# EAGLE board attiny85_5x4_led_matrix_badge (EAGLE 9.5.2)
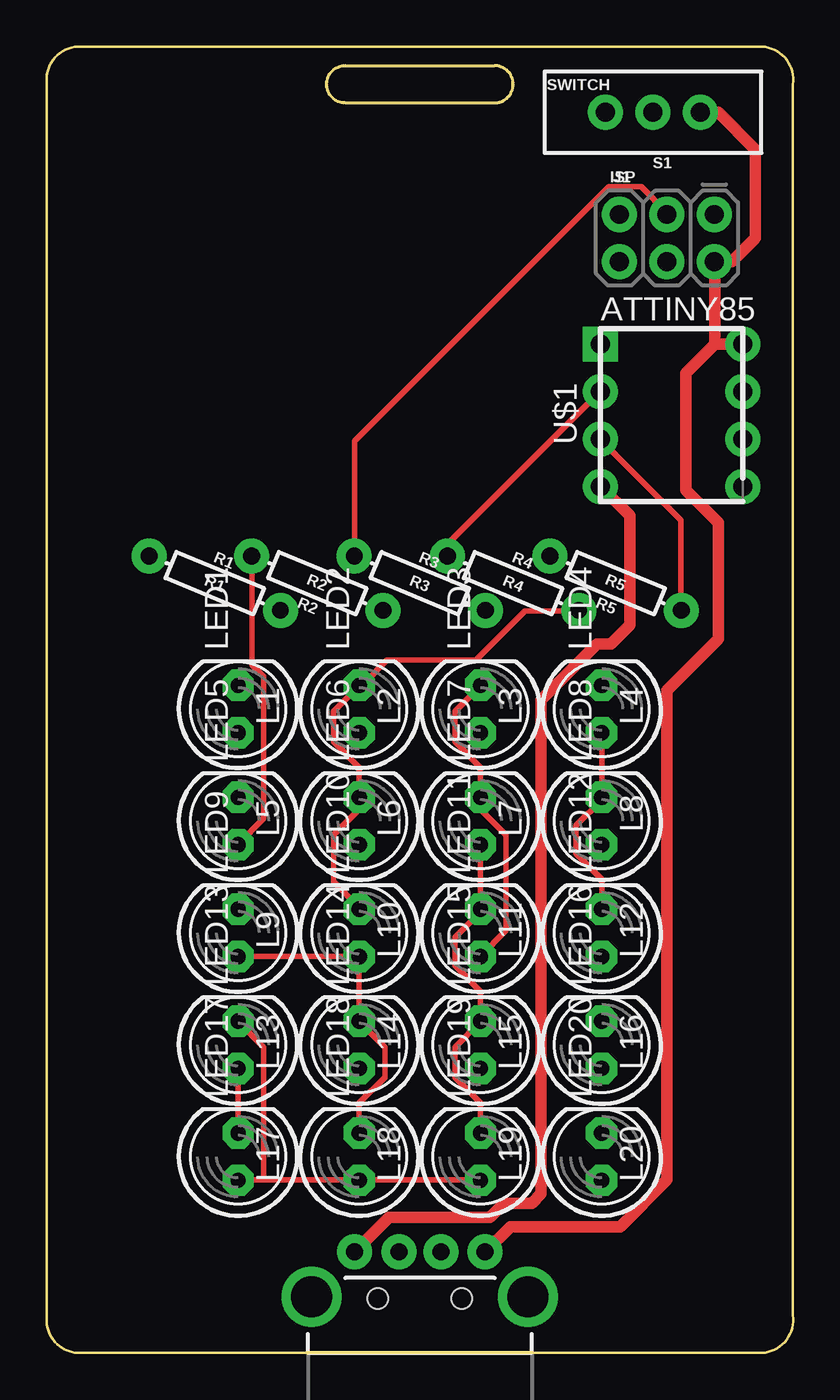
[diagram p0: board, top side]
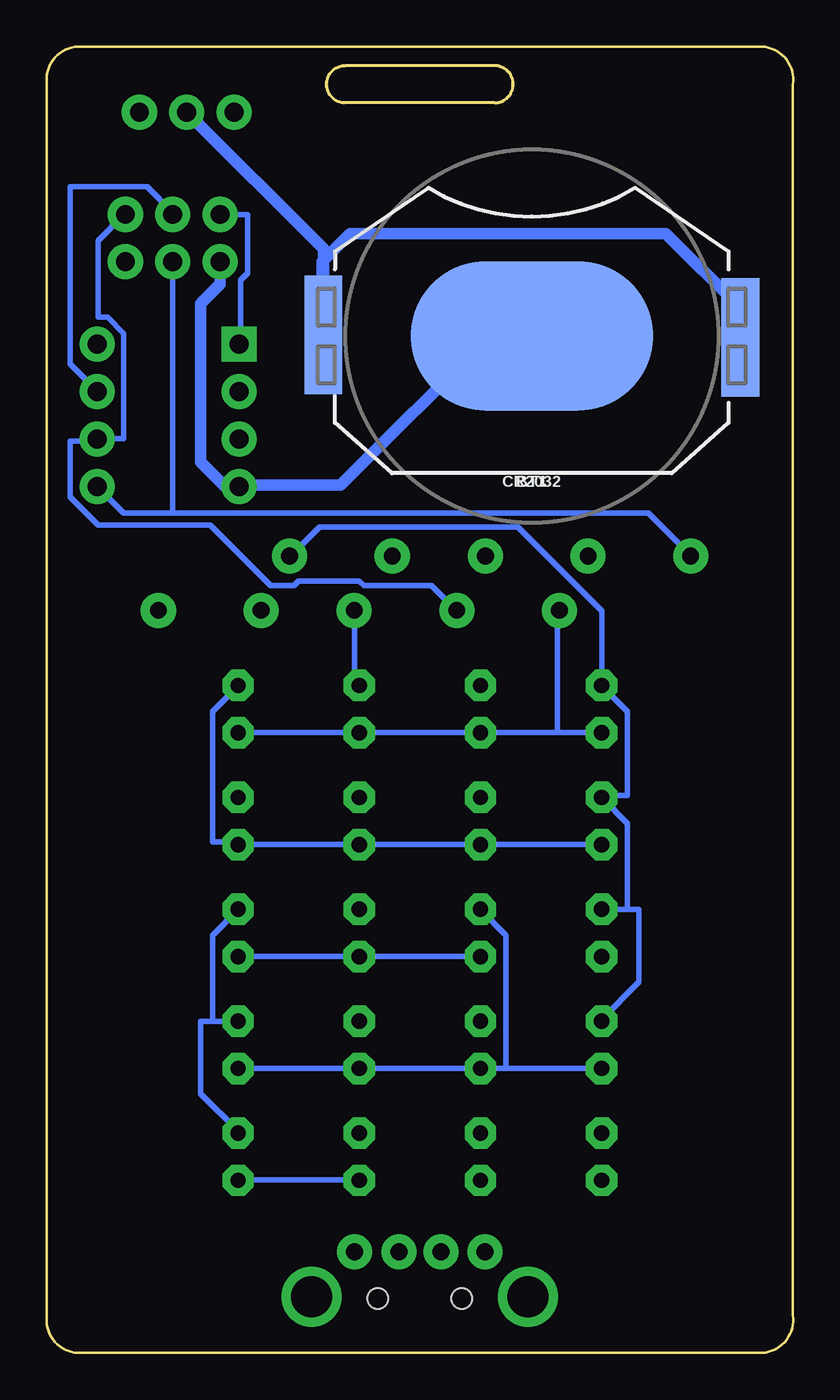
[diagram p1: board, bottom side, seen from below]

Size 40.03 x 70.03 mm. Coordinates in mm from the lower left corner, seen from the top.
Outline: 16.02,67.02 24.02,67.02 arc180 24.02,69.02 16.02,69.02 arc180 16.02,67.02
Outline: 0.02,68.02 arc-106 2.02,70.02 38.02,70.02 arc-106 40.02,68.02 40.02,2.02 arc-106 38.02,0.02 2.02,0.02 arc-106 0.02,2.02 0.02,68.02
Copper layers (1*16): Top 0.035mm / dielectric 1.5mm / Bottom 0.035mm
Design rules "seeed-studio-2-layer": minimum track width 12mil, minimum drill 12mil, track to track 12mil, track to pad 12mil, pad to pad 12mil, via to via 12mil, smd to smd 0mil, copper to edge 10mil, drill to drill 10mil, minimum pad ring 10mil, minimum via ring 6mil, stop-mask expansion 2mil, vias tented up to drill 100mil, thermal gap 10mil

## Footprints (pad centres in the part's own frame; a part is rotated, then mirrored left to right if it is on the bottom)
8P3 = drill 1.016 pad 1.88 square: 1 -3.81,3.81 | drill 1.016 pad 1.88: 2 -3.81,1.27; 3 -3.81,-1.27; 4 -3.81,-3.81; 5 3.81,-3.81; 6 3.81,-1.27; 7 3.81,1.27; 8 3.81,3.81
BATTCON_20MM_4LEGS = smd 13 x 8: NEGATIVE 0,0 | smd 2.032 x 3.175: POSITIVE@1 -11.176,1.651; POSITIVE@2 -11.176,-1.524; POSITIVE@3 11.176,1.524; POSITIVE@4 11.176,-1.651
2X3-NS = drill 1.016 pad 1.88: 1 -2.54,-1.27; 2 -2.54,1.27; 3 0,-1.27; 4 0,1.27; 5 2.54,-1.27; 6 2.54,1.27
USB-A-H = drill 0.914 pad 1.88: D+ 2.4,1.127; D- 2.4,-1.127; GND 2.4,3.5; VBUS 2.4,-3.5 | drill 2.2: SHLD1 0,-5.8; SHLD2 0,5.8 | hole 1.1: -0.1,2.25; -0.1,-2.25
LED5MM = drill 0.813 pad 1.676 octagon: A -1.27,0; K 1.27,0
AXIAL-0.3 = drill 0.9 pad 1.88: P$1 -3.81,0; P$2 3.81,0
SWITCH_SPDT_PTH_11.6X4.0MM = drill 1.016 pad 1.88: 1 0,2.54; 2 0,0; 3 0,-2.54

## Placement (x,y rotation side)
ATTINY85  ATTINY85  [8P3]  33.52,50.27 0 top
CR2032  [BATTCON_20MM_4LEGS]  14.02,54.52 180 bottom
ISP  AVR_SPI_PROG_3X2NS  [2X3-NS]  33.27,59.77 180 top
J2  USB_A_PTH_MALE  [USB-A-H]  20.02,3.02 90 top
L1  [LED5MM]  10.27,34.52 90 top
L2  [LED5MM]  16.77,34.52 90 top
L3  [LED5MM]  23.27,34.52 90 top
L4  [LED5MM]  29.77,34.52 90 top
L5  [LED5MM]  10.27,28.52 90 top
L6  [LED5MM]  16.77,28.52 90 top
L7  [LED5MM]  23.27,28.52 90 top
L8  [LED5MM]  29.77,28.52 90 top
L9  [LED5MM]  10.27,22.52 90 top
L10  [LED5MM]  16.77,22.52 90 top
L11  [LED5MM]  23.27,22.52 90 top
L12  [LED5MM]  29.77,22.52 90 top
L13  [LED5MM]  10.27,16.52 90 top
L14  [LED5MM]  16.77,16.52 90 top
L15  [LED5MM]  23.27,16.52 90 top
L16  [LED5MM]  29.77,16.52 90 top
L17  [LED5MM]  10.27,10.52 90 top
L18  [LED5MM]  16.77,10.52 90 top
L19  [LED5MM]  23.27,10.52 90 top
L20  [LED5MM]  29.77,10.52 90 top
R1  100  [AXIAL-0.3]  9.02,41.27 337.5 top
R2  100  [AXIAL-0.3]  14.52,41.27 157.5 top
R3  100  [AXIAL-0.3]  20.02,41.27 337.5 top
R4  100  [AXIAL-0.3]  25.02,41.27 337.5 top
R5  100  [AXIAL-0.3]  30.52,41.27 157.5 top
SWITCH  [SWITCH_SPDT_PTH_11.6X4.0MM]  32.52,66.52 270 top

## Library data of the parts
ATTINY85 = attiny85-eagle
CR2032 = SparkFun-Batteries; PROD_ID: BATT-10373; SF_SKU: PRT-11892
ISP = SparkFun-Connectors
J2 = SparkFun-Connectors; PROD_ID: CONN-08367; SF_ID: PRT-00437
L1-L20 = adafruit
R1-R5 = SparkFun-Resistors; PROD_ID: RES-12181
SWITCH = SparkFun-Switches; PROD_ID: SWCH-08261; SF_SKU: COM-00102

## Nets
GND: ATTINY85.4 CR2032.NEGATIVE ISP.6 J2.GND
N$1: L1.A L2.A L3.A L4.A L8.K L12.K L16.K L20.K R1.P$2
N$2: L4.K L5.A L6.A L7.A L8.A L11.K L15.K L19.K R2.P$2
N$6: L1.K L5.K L9.K L13.K L17.A L18.A L19.A L20.A R5.P$2
N$7: L2.K L6.K L10.K L13.A L14.A L15.A L16.A L17.K R4.P$2
N$8: L3.K L7.K L9.A L10.A L11.A L12.A L14.K L18.K R3.P$2
PB0/MOSI: ATTINY85.5 ISP.4 R1.P$1
PB1/MISO: ATTINY85.6 ISP.1 R2.P$1
PB2/SCK: ATTINY85.7 ISP.3 R3.P$1
PB3: ATTINY85.2 R4.P$1
PB4: ATTINY85.3 R5.P$1
PB5/RST: ATTINY85.1 ISP.5
VBAT: CR2032.POSITIVE@1 CR2032.POSITIVE@2 CR2032.POSITIVE@3 CR2032.POSITIVE@4 SWITCH.2
VCC: ATTINY85.8 ISP.2 J2.VBUS SWITCH.1

## Tracks (layer width: path | path; a pad name or v marks a point on that pad's centre or on a via)
GND
  Top 0.305: 16.89,5.52 16.52,5.52 J2.GND
  Top 0.61: J2.GND 18.37,7.27 23.77,7.27 24.52,8.02 26.02,8.02 26.52,8.52 26.52,35.02 29.52,38.02 30.27,38.02 31.27,39.02 31.27,44.9 ATTINY85.4
  Bottom 0.305: 30.77,58.39 ISP.6 | 29.77,46.52 ATTINY85.4 29.64,46.52
  Bottom 0.61: CR2032.NEGATIVE 16.27,54.52 24.27,46.52 29.77,46.52 | ATTINY85.4 30.46,46.46 31.77,47.77 31.77,56.27 30.73,57.31 ISP.6
N$1
  Top 0.305: L4.A L8.K 29.77,29.64 28.39,28.27 28.39,26.77 29.77,25.39 L12.K
  Bottom 0.305: 31.14,17.77 29.77,17.77 L16.K | 31.14,17.77 31.77,17.77 31.77,13.89 29.77,11.89 L20.K | 31.14,17.77 31.14,22.39 29.77,23.77 L12.K | 12.64,33.27 16.77,33.27 L2.A 16.89,33.27 23.27,33.27 L3.A 23.39,33.27 29.77,33.27 L4.A | 12.64,33.27 10.27,33.27 L1.A | 12.64,33.27 12.64,39.77 R1.P$2
N$2
  Top 0.305: R2.P$2 11.02,42.64 11.02,36.89 11.64,36.27 11.64,28.64 10.27,27.27 L5.A | L19.K 23.27,13.39 21.89,14.77 21.89,16.39 23.27,17.77 L15.K 23.27,19.39 21.89,20.77 21.89,22.27 23.27,23.64 L11.K L7.A
  Bottom 0.305: L5.A 10.27,27.27 16.77,27.27 L6.A 16.89,27.27 23.14,27.27 L7.A 23.27,27.27 29.77,27.27 L8.A 29.77,27.39 31.14,27.39 31.14,34.39 29.77,35.77 L4.K
N$6
  Top 0.305: 11.64,9.27 16.77,9.27 L18.A 16.89,9.27 23.27,9.27 L19.A | 11.64,9.27 10.27,9.27 L17.A | 11.64,9.27 11.64,16.39 10.27,17.77 L13.K
  Bottom 0.305: L20.A 29.77,9.27 23.27,9.27 L19.A | 8.89,23.77 10.27,23.77 L9.K | 8.89,23.77 8.27,23.77 8.27,19.89 10.27,17.89 L13.K | 8.89,23.77 8.89,28.39 10.27,29.77 L5.K 10.27,29.89 8.89,29.89 8.89,34.39 10.27,35.77 L1.K 10.27,39.77 14.77,44.27 25.39,44.27 26.89,42.77 R5.P$2
N$7
  Top 0.305: R4.P$2 28.52,39.77 25.64,39.77 23.02,37.14 18.27,37.14 16.89,35.77 L2.K 16.77,35.77 15.39,34.39 15.39,32.77 16.77,31.39 L6.K 16.77,29.14 15.39,27.77 15.39,25.27 16.77,23.89 L10.K | L13.A L17.K
  Bottom 0.305: 15.39,15.27 10.27,15.27 L13.A | 15.39,15.27 16.77,15.27 L14.A 16.89,15.27 23.27,15.27 L15.A 23.39,15.27 29.77,15.27 L16.A | 15.39,15.27 15.39,22.39 16.77,23.77 L10.K
N$8
  Top 0.305: L3.K 23.27,35.77 21.89,34.39 21.89,32.77 23.27,31.39 L7.K 23.27,29.14 24.64,27.77 24.64,22.64 23.27,21.27 L11.A | L18.K 16.77,13.39 18.14,14.77 18.14,16.39 16.77,17.77 L14.K L10.A 16.77,21.27 10.27,21.27 L9.A
  Bottom 0.305: R3.P$2 23.52,39.77 23.52,35.89 23.27,35.89 L3.K | L10.A 16.77,21.27 23.27,21.27 L11.A 23.39,21.27 29.77,21.27 L12.A
PB0/MOSI
  Bottom 0.305: 33.27,45.02 35.89,45.02 37.27,46.39 ATTINY85.5 | 33.27,45.02 7.77,45.02 5.52,42.77 R1.P$1 | 33.27,45.02 ISP.4
PB1/MISO
  Bottom 0.305: R2.P$1 18.14,39.89 19.39,41.14 23.02,41.14 23.27,41.39 26.52,41.39 26.77,41.14 28.02,41.14 31.27,44.39 37.27,44.39 38.77,45.89 38.77,48.89 37.39,48.89 ATTINY85.6 37.27,49.02 35.89,49.02 35.89,54.64 36.77,55.52 37.27,55.52 37.27,59.64 35.89,61.02 ISP.1
PB2/SCK
  Top 0.305: R3.P$1 16.52,42.77 16.52,48.89 30.14,62.52 31.89,62.52 33.27,61.14 ISP.3
  Bottom 0.305: ATTINY85.7 37.39,51.64 38.77,53.02 38.77,62.52 34.64,62.52 33.27,61.14 ISP.3
PB3
  Top 0.305: R4.P$1 21.52,42.77 21.52,43.39 29.64,51.52 ATTINY85.2
PB4
  Top 0.305: R5.P$1 34.02,39.89 34.02,44.64 29.77,48.89 ATTINY85.3
PB5/RST
  Bottom 0.305: ATTINY85.1 29.64,54.14 29.64,57.52 29.27,57.89 29.27,61.02 30.64,61.02 ISP.5
VBAT
  Bottom 0.305: CR2032.POSITIVE@1 2.89,52.89 2.89,56.02 CR2032.POSITIVE@2 3.02,56.02 | CR2032.POSITIVE@3 25.27,53.02 25.27,56.14 CR2032.POSITIVE@4 25.27,56.27
  Bottom 0.61: CR2032.POSITIVE@2 6.82,60.02 23.77,60.02 25.27,58.52 25.27,56.27 | CR2032.POSITIVE@4 25.19,59.19 SWITCH.2
VCC
  Top 0.305: 23.52,5.52 J2.VBUS | 35.89,58.39 ISP.2 35.77,58.64
  Top 0.61: J2.VBUS 24.87,6.77 30.77,6.77 33.27,9.27 33.27,35.52 36.02,38.27 36.02,44.52 34.27,46.27 34.27,52.52 35.83,54.08 | ATTINY85.8 35.83,54.08 | 35.83,54.08 35.83,58.33 35.89,58.39 | ISP.2 36.75,58.5 38.02,59.77 38.02,64.52 36.02,66.52 SWITCH.1

## Text on the board
_tNames: S1 | J1 | U$1 | R1 | R3 | R4 | R2 | R5 | LED1 | LED2 | LED3 | LED4 | LED5 | LED6 | LED7 | LED8 | LED9 | LED10 | LED11 | LED12 | LED13 | LED14 | LED15 | LED16 | LED17 | LED18 | LED19 | LED20 | J2
_bNames: BT1